# Altium PCB PIR Sensor driver v2.PcbDoc
Units mm, origin at the board's own origin, x right, y up, seen from the top; angles counter-clockwise.
Board outline 152.4 x 101.6 mm, 2 copper layers (Top Layer, Bottom Layer); 13 components, 11 nets, 34 pads, 2 vias.
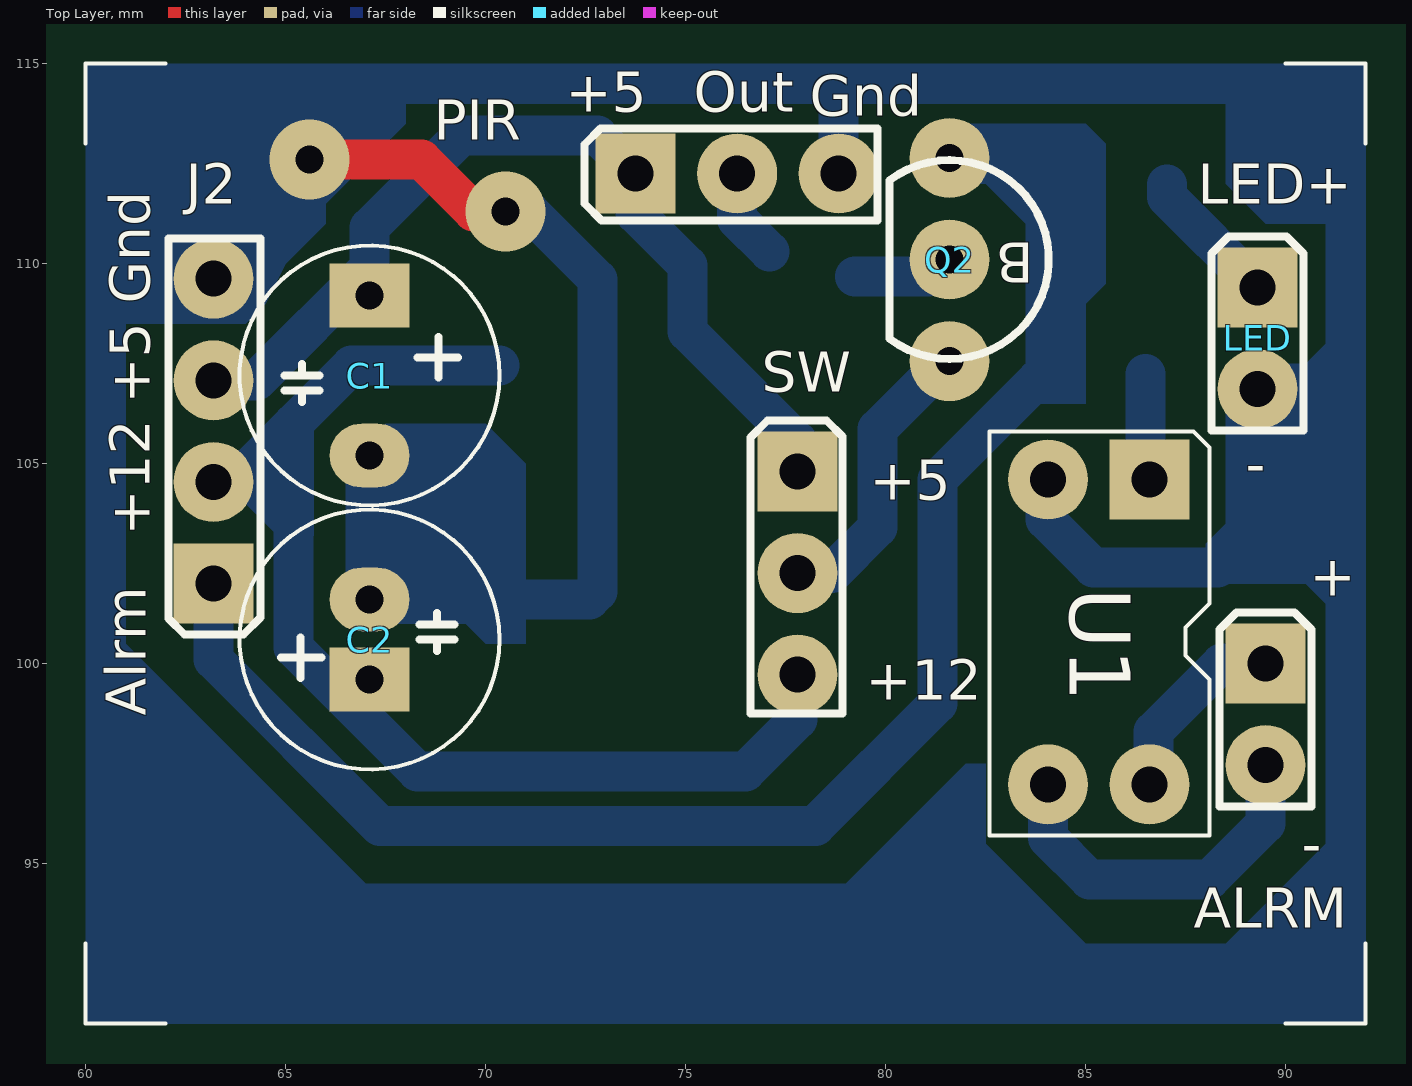
[diagram p0: Top Layer view]
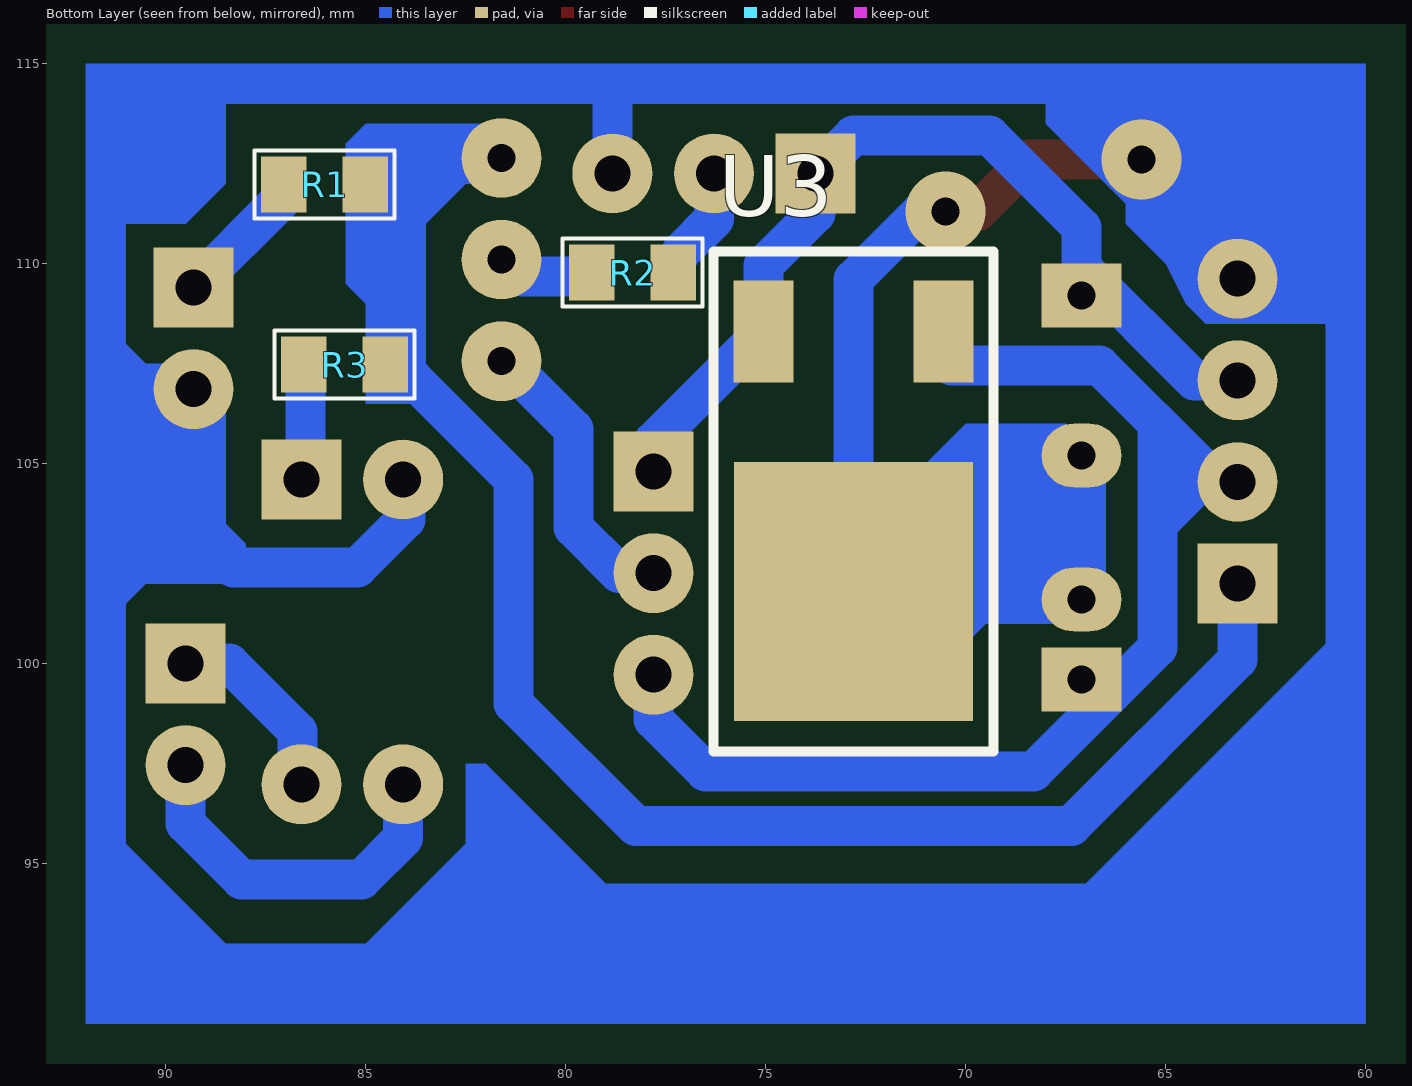
[diagram p1: Bottom Layer view, seen from below]
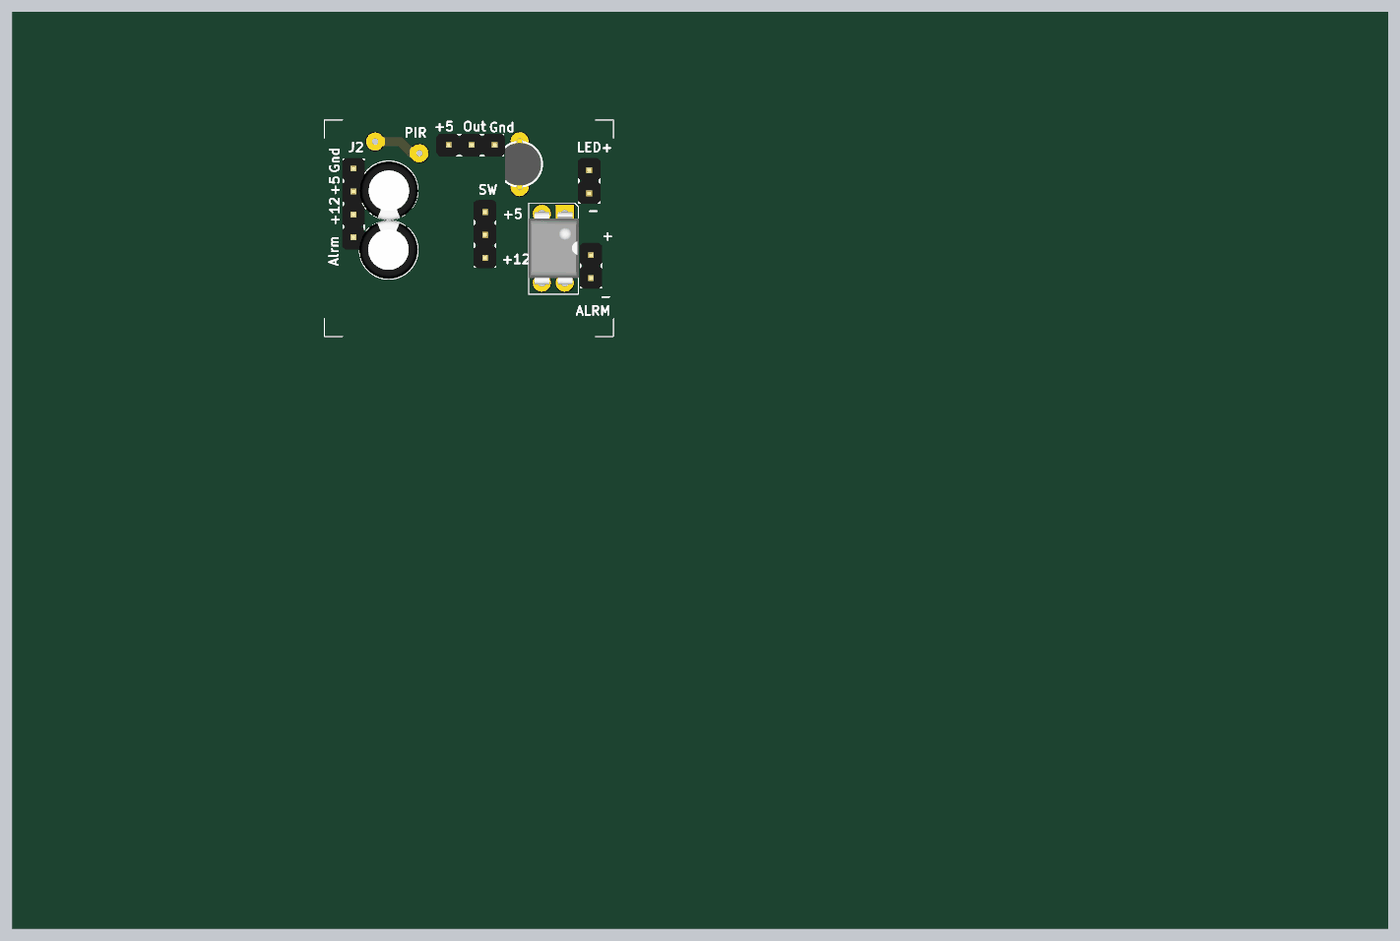
[diagram p2: 3D render of the assembled board from above, using the file's embedded part models]
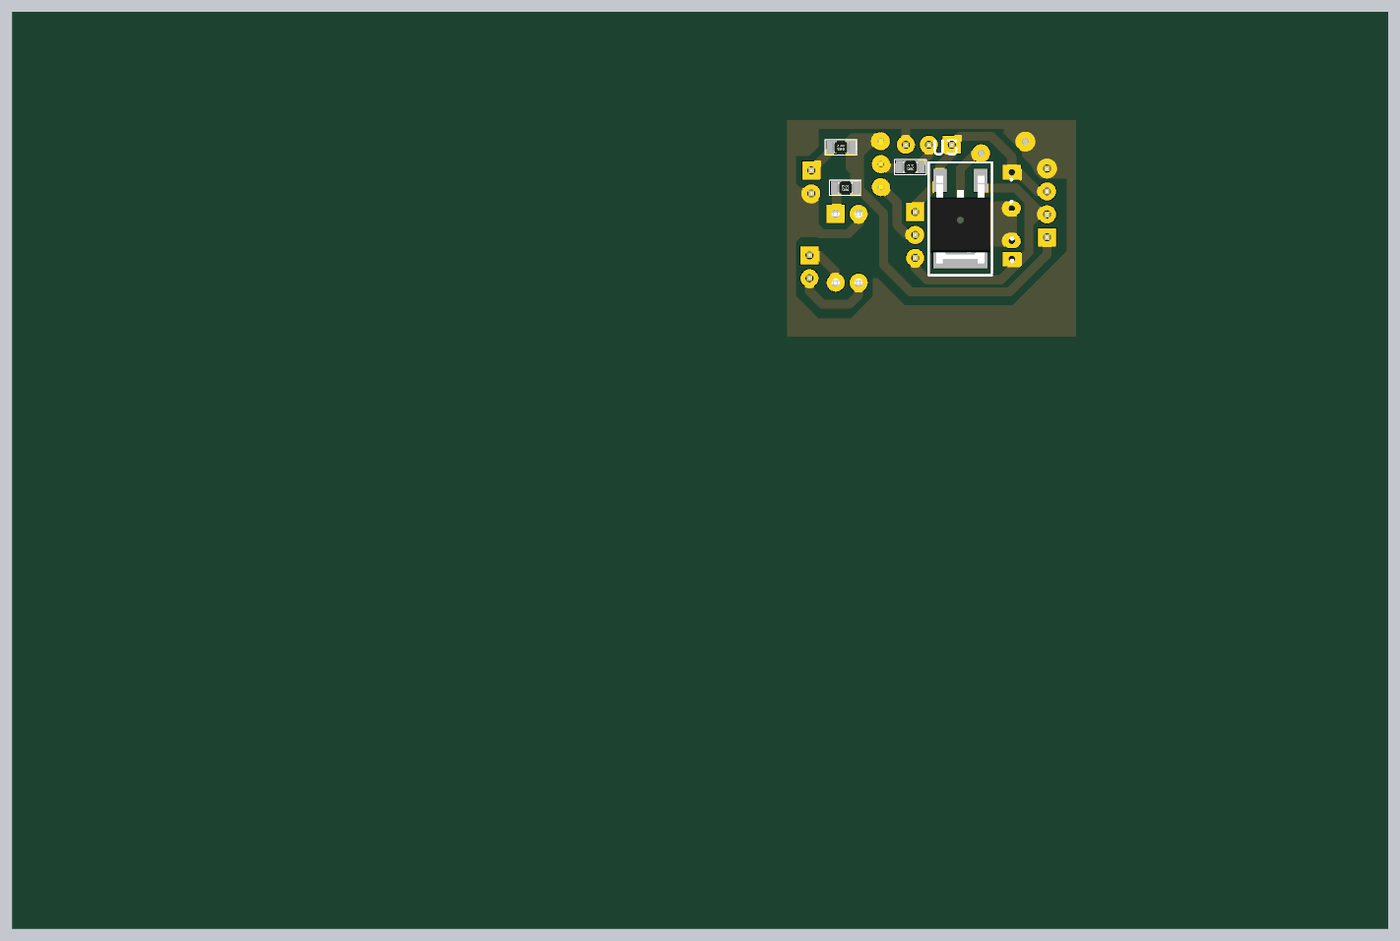
[diagram p3: 3D render of the assembled board from below, using the file's embedded part models]

## Layer stack, top to bottom
Top Solder: solder mask 0.0102, Solder Resist, Dk 3.5
Top Layer: signal copper 0.0356
Dielectric 1: dielectric 0.32, FR-4, Dk 4.8
Bottom Layer: signal copper 0.0356
Bottom Solder: solder mask 0.0102, Solder Resist, Dk 3.5

## Board outline
25.4,25.4 177.8,25.4 177.8,127 25.4,127

## Design rules (kind name [scope] priority, off if disabled: settings)
Clearance [All] p1: gap=0.2
ComponentClearance [All] p1: gap=0 collisioncheckmode=3 verticalgap=0 showdistances=FALSE
PolygonConnect [All] p1: connectstyle=Relief reliefconductorwidth=0.254 reliefentries=4 polygonreliefangle="90 Angle" airgapwidth=0.254
RoutingVias [All] p1: holewidth=0.7 width=2.54 viastyle="Through Hole" minholewidth=0.7 minwidth=2 maxholewidth=0.7 maxwidth=3
SolderMaskExpansion [All] p1: expansion=0.102
Width [All] p1: maxlimit=3 minlimit=0.5 preferedwidth=1
28 further rules are at their usual default settings.

## Components (designator, comment, footprint, x,y, rotation, side; value= is the part's Value field where it differs from the comment)
ALRM "PLS-2" "Line 2.54 x 2" 89.5,100 r0 top
C1 "220mF 16v" "Cap E p4mm D6.5xH11" 67.1,108.2 r270 top
C2 "220mF 16v" "Cap E p2mm D6.5xH11" 67.1,99.6 r90 top
J2 "PLS-4" "Line 2.54 X 4" 63.2,102 r180 top
LED "PLS-2" "Line 2.54 x 2" 89.3,109.4 r0 top
PIR "PLS-3" "Line 2.54 X 3" 73.75,112.25 r90 top
Q2 "S9014" "TO-92 2.54 (EBC)" 81.6,110.1 r180 top
R1 "560 Om" "SMD 0805 (2012)" 85,112 r0 bottom
R2 "1 kOm" "SMD 0805 (2012)" 77.3,109.8 r0 bottom
R3 "Om" "SMD 0805 (2012)" 84.5,107.5 r0 bottom
SW "PLS-3" "Line 2.54 X 3" 77.8,104.8 r0 top
U1 "Optocouplier" DIP-4 86.6,104.6 r270 top
U3 "7805C" D-PAK 72.8,101.8 r90 bottom

## Footprints (in the part's own frame and the unit in brackets; to place one, negate y for a bottom-side part, rotate by r counter-clockwise, add the part's x,y. Pads: shape width x height; smd on the part's side, far side on the other; paste and mask are expansions set on the pad)
"Cap E p2mm D6.5xH11" [mm] "D 6.5mm; H 11mm"
  rect 1.6x2 hole 0.7: 1(0,0)
  oval 1.6x2 hole 0.7: 2(2,0)
  silkscreen extent -2.25,-3.25 4.25,3.25, body extent -2.22,-3.22 4.27,3.28, height 11.49
"Cap E p4mm D6.5xH11" [mm] "D 6.5mm; H 11mm"
  rect 1.6x2 hole 0.7: 1(-1,0)
  oval 1.6x2 hole 0.7: 2(3,0)
  silkscreen extent -2.25,-3.25 4.25,3.25, body extent -2.22,-3.22 4.27,3.28, height 11.49
D-PAK [mm]
  rect 2.54x1.5 smd: 1(6.5,-2.25) 3(6.5,2.25)
  rect 6.48x5.97 smd: 2(0,0)
  silkscreen extent -4,-3.5 8.5,3.5, body extent -2.7,-3.29 7,3.29, height 2.3
DIP-4 [mm]
  rect 2x2 hole 0.9: 1(0,0)
  round 2 hole 0.9: 2(0,-2.54) 3(7.62,0) 4(7.62,-2.54)
  silkscreen extent -1.2,-4 8.9,1.5, body extent -0.2,-4 7.8,1.54, height 4.31
"Line 2.54 x 2" [mm]
  rect 2x2 hole 0.9: 1(0,0)
  round 2 hole 0.9: 2(0,-2.54)
  silkscreen extent -1.15,-3.57 1.15,1.28, body extent -1.25,-3.69 1.25,1.39, height 8.3
"Line 2.54 X 3" [mm]
  rect 2x2 hole 0.9: 1(0,0)
  round 2 hole 0.9: 2(0,-2.54) 3(0,-5.08)
  silkscreen extent -1.17,-6.05 1.12,1.27, body extent -1.27,-6.24 1.22,1.38, height 8.2
"Line 2.54 X 4" [mm]
  rect 2x2 hole 0.9: 1(0,0)
  round 2 hole 0.9: 2(0,-2.54) 3(0,-5.08) 4(0,-7.62)
  silkscreen extent -1.17,-8.62 1.12,1.27, body extent -1.25,-8.78 1.25,1.38, height 8.2
"SMD 0805 (2012)" [mil]
  rect 45x55 smd: 1(0.35,0.98) 2(80.35,0.98)
  silkscreen extent -29,-32 109,34, body extent 1,-24 80,26, height 18
"TO-92 2.54 (EBC)" [mm] "TO, Flat Index; 3 In-Line, Axial Leads; Body Dia. 4.5mm; Leads 0.51 x 0.48 mm (max)"
  round 2 hole 0.7: B(0,0) C(0,2.54) E(0,-2.54)
  silkscreen extent -2.48,-2.48 1.5,2.48, body extent -2.37,-2.79 1.6,2.79, height 5.7

## Part data
ALRM J2 LED PIR SW: "Vert, Sgl line, Male"
C1 C2: library part "Cap E 220mF x 16V", "Capacitor"
Q2: "NPN Bipolar Transistor"
R1 R2 R3: library part "Res SMD 0805"
U1: library part "Optocouplier LTV 817B"
U3: "Voltage Regulator"

## Via types
v1: diameter 2, hole 0.7, Top Layer to Bottom Layer, 2 vias

## Nets (pads, with @x,y where several pads share a name; then routed paths per layer and width w, separated by ;. In a path a pad name is that pad's centre, name@x,y a point inside that pad or via, vN(x,y) a via of type N, cw(c..) or ccw(c..) an arc to the next point about the centre after c; other vN are vias at no path point)
+5V: C1.1 J2.3 PIR.1 SW.1 U3.3 | length 23.2
  Bottom Layer w1: J2.3 64.28,107.08 67.1,109.9 67.1,110.9 69.4,113.2 72.8,113.2 PIR.1 73.75,111.25 75.05,109.95 U3.3 77.8,105.55 SW.1
+12V: C2.1 J2.2 SW.3 U3.1 | length 28.9
  Bottom Layer w1: J2.2 63.26,104.6 65.2,104.6 ; U3.1@70.35,107.45 66.65,107.45 65.2,106 65.2,104.6 ; SW.3 77.8,98.6 76.5,97.3 68.3,97.3 65.2,100.4 65.2,104.6
"ALARM OUT": J2.1 Q2.E R1.1 R3.1 | length 35.8
  Bottom Layer w1: J2.1 63.2,100.1 67.356,95.944 78.244,95.944 81.3,99 81.3,104.6 83.8,107.1 ; Q2.E@81.6,112.74 84.244,112.74 R1.1
GND: C1.2 C2.2 J2.4 LED.2 PIR.3 U1.2 U3.2 | length 45.9
  Top Layer w1: v1(65.6,112.6) 68.4,112.6 69.7,111.3 v1(70.5,111.3)
  Bottom Layer w1: 60.76,109.64 J2.4@63.2,109.64 ; 62.7,112.7 62.8,112.6 v1(65.6,112.6) ; C1.2 C2.2 72.6,101.6 U3.2 72.8,109.6 71.1,111.3 v1(70.5,111.3) ; PIR.3 78.83,114.43 78.9,114.5 ; U1.2@84,104.6 84,103.6 85.2,102.4 88.3,102.4 89.3,103.4 LED.2 91.26,106.86
NetALRM_1: ALRM.1 U1.3 | length 4.9
  Bottom Layer w1: U1.3 86.7,97.08 86.7,98.3 88.4,100 ALRM.1
NetALRM_2: ALRM.2 U1.4 | length 9.3
  Bottom Layer w1: U1.4 84.06,95.64 85.1,94.6 88.1,94.6 89.5,96 ALRM.2
NetLED_1: LED.1 R1.2 | length 3.5
  Bottom Layer w1: R1.2 87.041,111.659 LED.1
NetQ2_B: Q2.B R2.2 | length 2.6
  Bottom Layer w1: R2.2@79.241,109.675 81.075,109.675 Q2.B@81.6,110.2
NetQ2_C: Q2.C SW.2 | length 7.5
  Bottom Layer w1: SW.2 78.66,102.26 79.8,103.4 79.8,105.86 Q2.C@81.6,107.66
NetR3_2: R3.2 U1.1 | length 1.7
  Bottom Layer w1: U1.1@86.5,105.5 R3.2@86.5,107.234
"SENSOR OUT": PIR.2 R2.1 | length 2.3
  Bottom Layer w1: PIR.2 76.29,111.11 R2.1@77.1,110.3

## Other copper
Bottom Layer:
  region net +12V: 62.5,105 63.5,105 65,106.5 65.7,106.5 65.7,103.2 65.5,103 65,103 64,104 63,104
  region net GND: 91.5,108 91,108 90.5,107.5 89,107.5 88.5,107 88.5,103.5 88,103 88,102 90.5,102 91,101.5 91.5,102
  region net "ALARM OUT": 81.5,113.5 85,113.5 85.5,113 85.5,109.5 85,109 85,106.5 83.5,106.5 83.5,111 82.5,112 81.5,112
  region net GND: 66.5,105.5 66.5,101.5 67,101 69.5,101 70,100.5 71,100.5 71,105 70,106 67.5,106
  region net GND: 68,114.5 68,113.5 66,111.5 66,111 65,110 64.5,109 64,108.5 60.5,108.5 60.5,114.5
  region net GND: 60,115 60,91 91,91 91,95.5 88.5,93 85,93 82.5,95.5 82.5,97.5 82,97.5 79,94.5 67,94.5 61,100.5 61,111 64,111 64,114 88.5,114 88.5,112 89,111.5 89.5,111 91,111 91,91 92,91 92,115

## Silkscreen, mask and mechanical layers (free items; w line width, h text height)
Top Overlay:
  lines w0.1: 60,93 60,91 62,91 ; 60,113 60,115 62,115 ; 90,91 92,91 92,93 ; 90,115 92,115 92,113
  text "+5" at 72,113.8 h1
  text "Out" at 75.2,113.8 h1
  text "Gnd" at 78.1,113.7 h1
  text "LED+" at 87.8,111.5 h1
  text "Gnd" at 61.6,109 h1 r90
  text "+5" at 61.6,106.5 h1 r90
  text "-" at 89,104.5 h1
  text "+5" at 79.6,104.1 h1
  text "+12" at 61.6,103.2 h1 r90
  text "+" at 90.6,101.7 h1
  text "+12" at 79.5,99.1 h1
  text "Alrm" at 61.5,98.7 h1 r90
  text "-" at 90.4,95 h1

## Text inside footprints (layer, text, board x,y; h text height)
Q2: Top Overlay "B" at 83.7,110.525 h1 r180